# EAGLE board lucid (EAGLE 6.1)
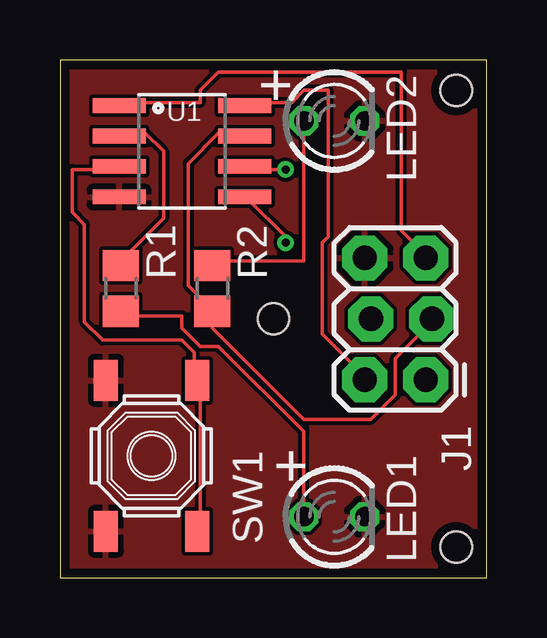
[diagram p0: board, top side]
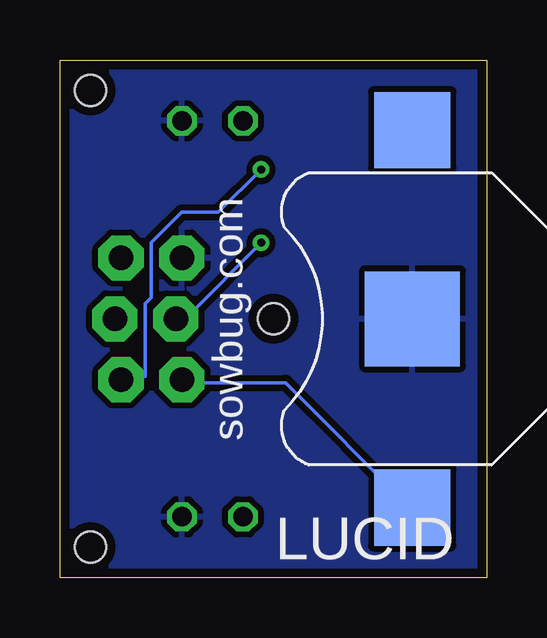
[diagram p1: board, bottom side, seen from below]

Size 17.78 x 21.59 mm. Coordinates in mm from the lower left corner, seen from the top.
Outline: 0,0 17.78,0 17.78,21.59 0,21.59 0,0
Copper layers (1*16): Top 0.0356mm / dielectric 1.5011mm / Bottom 0.0356mm
Design rules: minimum track width 6mil, minimum drill 13mil, track to track 6mil, track to pad 6mil, pad to pad 6mil, via to via 6mil, smd to smd 6mil, copper to edge 15mil, drill to drill 6mil, minimum pad ring 7mil, minimum via ring 7mil, stop-mask expansion 4mil, vias tented up to drill 0mil, thermal gap 10mil
Holes 1.3 mm at 16.51,20.32 16.51,1.27 8.89,10.79

## Footprints (pad centres in the part's own frame; a part is rotated, then mirrored left to right if it is on the bottom)
BATTCON_12MM = smd 3.962 x 3.962: GND 0,0 | smd 3.175 x 3.175: PWR@1 -7.874,0; PWR@2 7.874,0
2X3_LOCK = drill 1.016 pad 1.88 octagon: 1 0,0; 2 0,2.54; 3 2.54,-0.254; 4 2.54,2.286; 5 5.08,0; 6 5.08,2.54
LED-3MM = drill 0.813 octagon: A -1.27,0; K 1.27,0
R805 = smd 1.3 x 1.5: 1 -0.95,0; 2 0.95,0
SW_TACT_SMALL = smd 1.7 x 1: 1 -3.15,1.9; 2 3.15,1.9; 3 -3.15,-1.9; 4 3.15,-1.9
SO08 = smd 0.61 x 2.21: 1 -1.905,-2.616; 2 -0.635,-2.616; 3 0.635,-2.616; 4 1.905,-2.616; 5 1.905,2.616; 6 0.635,2.616; 7 -0.635,2.616; 8 -1.905,2.616

## Placement (x,y rotation side)
BAT1  CR1220  [BATTCON_12MM]  3.1,10.79 90 bottom
J1  AVR_SPI_PRG_62X3_LOCK  [2X3_LOCK]  15.24,8.26 90 top
LED1  LEFT  [LED-3MM]  11.43,2.54 0 top
LED2  RIGHT  [LED-3MM]  11.43,19.05 0 top
R1  150  [R805]  2.54,12.06 270 top
R2  150  [R805]  6.35,12.06 90 top
SW1  Now  [SW_TACT_SMALL]  3.81,5.08 270 top
U1  ATTINY13SOIC  [SO08]  5.08,17.78 270 top

## Library data of the parts
BAT1 J1 U1 = SparkFun
LED1 LED2 R1 R2 SW1 = dp_devices

## Nets
/RESET: J1.5 U1.1
GND: BAT1.GND J1.6 LED1.K LED2.K SW1.3 SW1.4 U1.4
L1-R: LED1.A R1.2
L2-R: LED2.A R2.2
MISO: J1.1 U1.6
MOSI: J1.4 U1.5
PB2/SCK: J1.3 R2.1 U1.7
PB3: R1.1 U1.2
PB4: SW1.1 SW1.2 U1.3
VCC: BAT1.PWR@1 J1.2 U1.8

## Tracks (layer width: path | path; a pad name or v marks a point on that pad's centre or on a via)
/RESET
  Top 0.152: U1.1 2.54,19.81 5.84,19.81 5.84,20.32 6.6,21.08 14.22,21.08 14.22,14.48 15.24,13.46 J1.5
GND
  pour Bottom (isolate 0.254): -1.27,22.86 20.32,22.86 20.32,-1.27 -1.27,-1.27
  pour Top: 0,21.59 19.05,21.59 19.05,0 0,0
L1-R
  Top 0.152: LED1.A 10.16,6.1 6.6,9.65 5.84,9.65 5.08,10.41 5.08,10.92 2.54,10.92 R1.2
L2-R
  Top 0.152: LED2.A 10.16,13.21 6.35,13.21 R2.2
MISO  (via drill 0.33)
  Top 0.152: v9.4,17.02 7.87,17.02 U1.6
  Bottom 0.152: v9.4,17.02 11.18,15.24 12.7,15.24 13.97,13.97 13.97,11.68 14.22,11.43 14.22,8.38 15.24,8.38 J1.1
MOSI  (via drill 0.33)
  Top 0.152: v9.4,13.97 9.4,14.22 7.87,15.75 U1.5
  Bottom 0.152: v9.4,13.97 12.45,10.92 12.95,10.92 J1.4
PB2/SCK
  Top 0.152: U1.7 7.62,18.54 6.6,18.54 5.33,17.27 5.33,12.19 6.35,11.18 R2.1 6.35,10.92 6.35,10.41 10.16,6.6 12.95,6.6 13.97,7.62 13.97,9.14 15.49,10.67 J1.3
PB3
  Top 0.152: R1.1 2.54,13.21 4.32,14.99 4.32,17.78 3.56,18.54 2.54,18.54 U1.2
PB4
  Top 0.152: SW1.2 5.84,2.03 5.84,8.13 SW1.1 5.59,8.38 5.59,9.4 5.08,9.91 1.78,9.91 1.02,10.67 1.02,14.73 0.51,15.24 0.51,17.02 2.29,17.02 U1.3
VCC
  Top 0.152: U1.8 7.87,19.81 9.65,19.81 10.16,20.32 11.18,20.32 11.18,14.22 10.92,13.97 10.92,10.16 12.7,8.38 J1.2
  Bottom 0.152: BAT1.PWR@1 3.3,3.05 8.38,8.13 12.7,8.13 J1.2

## Text on the board
tPlace: + | +
bNames: sowbug.com | LUCID